# Altium PCB PCB1.PcbDoc (part 6 of 6)
Units mil, origin at the board's own origin, x right, y up, seen from the top; angles counter-clockwise.
Board outline 7480.32 x 4921.26 mil, 4 copper layers (Top Layer, GND, POWER, Bottom Layer), stack 23.756 mil thick; 513 components, 387 nets, 1792 pads, 594 vias.
Unrouted connection lines stored in the file: 21.
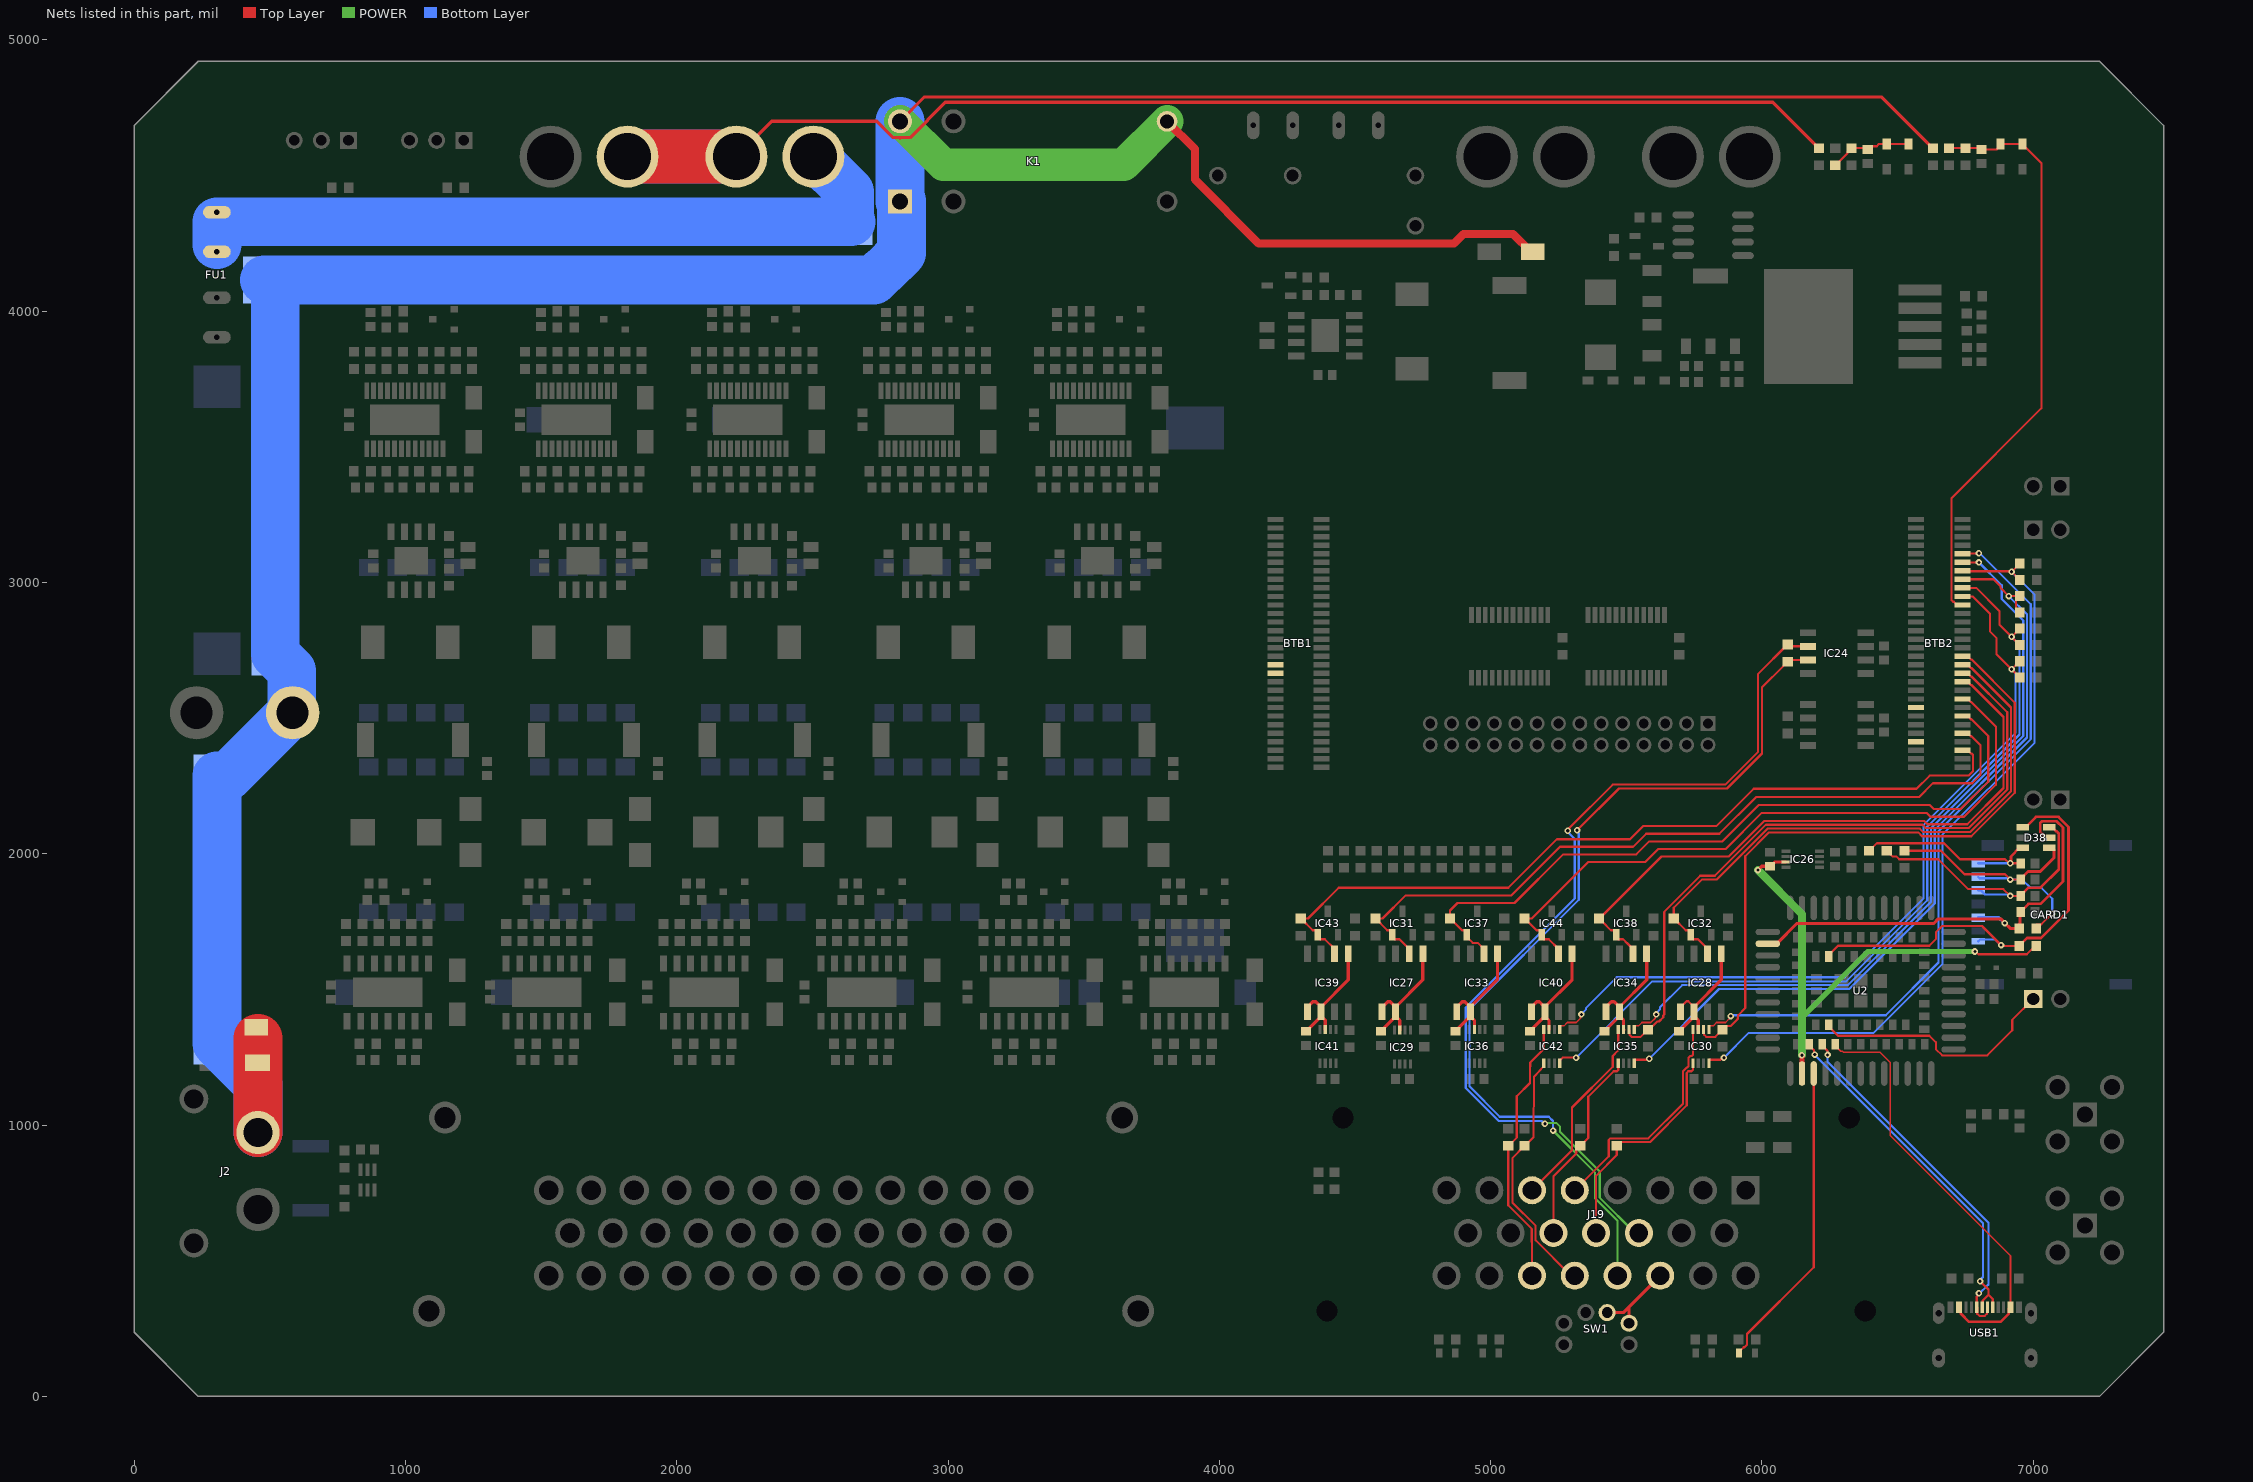
[diagram p7: the nets of this part, all layers, seen from the top]

## Via types
v1: diameter 24, hole 12, Top Layer to Bottom Layer, 532 vias
v2: diameter 48, hole 30, Top Layer to Bottom Layer, 20 vias
v3: diameter 48, hole 24, Top Layer to Bottom Layer, 16 vias
v4: diameter 48, hole 32, Top Layer to Bottom Layer, 10 vias
v5: diameter 60, hole 32, Top Layer to Bottom Layer, 7 vias
v6: diameter 251.97, hole 165.35, Top Layer to Bottom Layer, 4 vias
v7: diameter 31.5, hole 31.5, Top Layer to Bottom Layer, 2 vias
v8: diameter 47.24, hole 47.24, Top Layer to Bottom Layer, 2 vias
v9: diameter 36, hole 24, Top Layer to Bottom Layer, 1 vias

## Nets (pads, with @x,y where several pads share a name; then routed paths per layer and width w, separated by ;. In a path a pad name is that pad's centre, name@x,y a point inside that pad or via, vN(x,y) a via of type N, cw(c..) or ccw(c..) an arc to the next point about the centre after c; other vN are vias at no path point) (continued)
OE5_PTE14: BTB2.12 IC35.6 R187.1 | length 2538.4
  Top Layer w8: IC35.6@5509.84,1352.01 5511.75,1350.1 5511.75,1333.01 5519.48,1325.28 5552.8,1325.28 5579.02,1351.5 R187.1@5580,1351.5 5593.72,1365.21 5596.98,1365.21 5613.77,1382 5620.77,1382 5636,1397.23 5636,1404.23 5640,1408.23 5640,1786.21 5772.79,1919 5826.39,1919 6014.39,2107 6592.19,2107 6604.19,2095 6762.3,2095 6904.11,2236.82 6904.11,2521.84 6772.25,2653.7 6769.92,2653.7 6758.27,2665.35 BTB2.12@6738.58,2665.35
OE6_PTC31: BTB2.14 IC30.6 R182.1 | length 2484.3
  Top Layer w8: IC30.6@5784.84,1352.01 5786.75,1350.1 5786.75,1333.01 5794.48,1325.28 5827.8,1325.28 5854.02,1351.5 R182.1@5855,1351.5 5868.72,1365.21 5884.67,1365.21 5910.8,1391.34 5910.8,1394.03 5912.28,1395.51 5912.28,1405.51 5938.33,1431.57 5938.33,1991.35 6025.98,2079 6576,2079 6590,2065 6771.89,2065 6932.11,2225.22 6932.11,2556.83 6772.25,2716.69 6769.92,2716.69 6758.27,2728.35 BTB2.14@6738.58,2728.35
PCAN_H: IC24.7 J19.19 R165.2 | length 3397.9
  Top Layer w8: v1(5318.38,2086.62) 5472.77,2241 5871,2241 6000,2370 6000,2613.5 6080.3,2693.8 6080.3,2694.79 6094.02,2708.5 R165.2@6095,2708.5 6101.5,2715 IC24.7@6170,2715
  POWER w8: v1(5230,980) 5385,825 5385,729.88 5467.56,647.33 J19.19@5467.56,445.04
  Bottom Layer w8: v1(5230,980) 5230,1015 5214,1031 5033.8,1031 4922,1142.8 4922,1427.81 5325,1830.81 5325,2075.67 5318.38,2082.29 v1(5318.38,2086.62)
PCAN_L: IC24.6 J19.11 R165.1 | length 3398.7
  Top Layer w8: v1(5284.44,2084.68) 5284.44,2089.01 5290,2094.57 5290,2095 5450,2255 5865,2255 5986,2376 5986,2663.48 6094.02,2771.5 R165.1@6095,2771.5 6101.5,2765 IC24.6@6170,2765
  POWER w8: v1(5200,1005) 5203.06,1008.06 5212.49,1008.06 5212.69,1008.26 5241.74,1008.26 5256,994 5256,975 5401.89,829.11 5401.89,732.8 5532.16,602.52 J19.11@5546.3,602.52
  Bottom Layer w8: v1(5200,1005) 5197.31,1005 5187.31,1015 5030,1015 4908,1137 4908,1433.6 5310,1835.6 5310,2054.79 5284.44,2080.35 v1(5284.44,2084.68)
PTA24: BTB1.49
PTA25: BTB1.48
PTC10: BTB2.25 IC35.5 | length 2829.2
  Top Layer w6: IC35.5@5529.53,1352.01 5529.53,1362.83 5532.43,1365.74 5545.1,1365.74 5557.57,1378.21 5590.53,1378.21 5606.56,1394.24 5606.56,1404.56 v1(5610,1408)
  Top Layer w8: BTB2.25@6738.58,3074.8 6738.98,3074.4 6799.6,3074.4 v1(6800,3074)
  Bottom Layer w8: v1(5610,1408) 5610,1412.33 5623.8,1426.13 5623.8,1433.8 5706,1516 6316.2,1516 6623,1822.8 6623,2094.3 6963,2434.3 6963,2860.23 6884,2939.23 6884,2990 v1(6800,3074)
PTC10_H: IC35.8 J19.6 | length 723.7
  Top Layer w8: J19.6@5152.6,760 5300,907.4 5300,1065 5450,1215 5450,1255 5470.47,1275.47 IC35.8@5470.47,1352.01
PTC11: BTB2.23 IC35.4 R198.2 R199.1 | length 2971.1
  Top Layer w8: IC35.4@5529.53,1227.99 5529.53,1238.82 5531.43,1240.72 5576.39,1240.72 5580.67,1245 v1(5585,1245) ; BTB2.23@6738.58,3011.81 6853.19,3011.81 6878.98,2986.02 6878.98,2981.02 v1(6910,2950) 6936.28,2950 R199.1@6936.28,2935.3 ; R198.2@6950,2890 6936.99,2903.01 6936.99,2936.99 R199.1@6950,2950
  Bottom Layer w8: v1(5585,1245) 5842,1502 6322,1502 6637,1817 6637,2088.5 6977,2428.5 6977,2883 v1(6910,2950)
PTC11_H: IC35.1 J19.13 R197.1 | length 732.7
  Top Layer w8: J19.13@5231.34,602.52 5231.34,811.34 5315.56,895.56 5315.56,909.79 5329.27,923.5 R197.1@5330,923.5 5330.98,923.5 5360,952.52 5360,1104.97 5453.53,1198.5 5465.79,1198.5 5470.47,1203.19 IC35.1@5470.47,1227.99
PTC24: BTB2.21 IC42.5 R203.2 R204.1 | length 3001.6
  Top Layer w6: IC42.5@5254.53,1352.01 5254.53,1362.83 5257.43,1365.74 5270.1,1365.74 5282.57,1378.21 5315.53,1378.21 5331.35,1394.04 5331.35,1404.56 v1(5334.8,1408)
  Top Layer w8: BTB2.21@6738.58,2948.82 6776.86,2948.82 6840,2885.68 6840,2820 6865,2795 6865,2735 v1(6920,2680) ; R203.2@6950,2650 6950,2650.98 6936.28,2664.7 6935.3,2664.7 v1(6920,2680) ; R204.1@6950,2710 6950,2709.02 6936.28,2695.3 6935.3,2695.3 v1(6920,2680)
  Bottom Layer w8: v1(5334.8,1408) 5334.8,1409.34 5351.09,1425.64 5351.09,1431.3 5464.8,1545 6305,1545 6595,1835 6595,2105.89 6935,2445.89 6935,2665 v1(6920,2680)
PTC24_H: IC42.8 J19.21 R202.1 | length 997.5
  Top Layer w8: J19.21@5152.6,445.04 5152.6,568.59 5151.67,569.52 5151.67,617.59 5065,704.25 R202.1@5065,923.5 5065.98,923.5 5096.3,953.82 5096.3,1106.3 5145,1155 5145,1195 5146.02,1231.02 5195.47,1280.47 IC42.8@5195.47,1352.01
PTC25: BTB2.22 IC42.4 R210.2 R211.1 | length 3095.3
  Top Layer w8: IC42.4@5254.53,1237.89 5254.53,1238.82 5256.43,1240.72 5257.36,1240.72 5265.42,1248.79 v1(5315,1248.79) ; BTB2.22@6738.58,2980.31 6789.69,2980.31 6875,2895 6875,2845 v1(6920,2800) ; R210.2@6950,2770 6950,2770.98 6936.28,2784.7 6935.3,2784.7 v1(6920,2800) ; R211.1@6950,2830 6950,2829.02 6936.28,2815.3 6935.3,2815.3 v1(6920,2800)
  Bottom Layer w8: v1(5315,1248.79) 5596.21,1530 6310.4,1530 6609,1828.6 6609,2100.1 6949,2440.1 6949,2771 v1(6920,2800)
PTC25_H: IC42.1 J19.20 R209.1 | length 932.4
  Top Layer w8: IC42.1@5195.47,1227.99 5193.57,1215.26 5162.12,1181.22 5160.23,1179.17 5160.19,1176.11 5157.54,955.06 5155.23,952.75 5125.98,923.5 R209.1@5125,923.5 5080,878.5 5080,715 5165.67,629.33 5165.67,575.32 5295.94,445.04 J19.20@5310.08,445.04
PTC26: BTB2.24 IC30.4 R213.2 R214.1 | length 2909.6
  Top Layer w8: IC30.4@5804.53,1227.99 5804.53,1238.82 5806.43,1240.72 5847.61,1240.72 5855.67,1248.79 v1(5860,1248.79) ; BTB2.24@6738.58,3043.31 6740.24,3041.65 6918.35,3041.65 v1(6920,3040) ; R213.2@6950,3010 6950,3010.98 6936.28,3024.7 6935.3,3024.7 v1(6920,3040) ; R214.1@6950,3070 6950,3069.02 6920.98,3040 v1(6920,3040)
  Bottom Layer w8: v1(5860,1248.79) 5951.21,1340 6411.57,1340 6665,1593.43 6665,2070 7005,2410 7005,2955 v1(6920,3040)
PTC26_H: IC30.1 J19.12 R212.1 | length 843.8
  Top Layer w8: J19.12@5388.82,602.52 5388.82,813.82 5465,890 R212.1@5465,923.5 5478.72,937.22 5562.22,937.22 5587.02,937.22 5722.68,1072.88 5722.68,1097.68 5722.68,1192.65 5728.53,1198.5 5740.79,1198.5 5745.47,1203.19 IC30.1@5745.47,1227.99
PTC27: BTB2.26 IC30.5 | length 2750.4
  Top Layer w6: IC30.5@5804.53,1352.01 5804.53,1362.83 5807.43,1365.74 5820.1,1365.74 5832.57,1378.21 5865.53,1378.21 5884.8,1397.48 v1(5884.8,1402.1)
  Top Layer w8: BTB2.26@6738.58,3106.3 6739.43,3107.15 6799.15,3107.15 v1(6800,3108)
  Bottom Layer w8: v1(5884.8,1402.1) 5887.69,1405 6456.77,1405 6651,1599.23 6651,2082.7 6991,2422.7 6991,2919.77 6802.77,3108 v1(6800,3108)
PTC27_H: IC30.8 J19.5 | length 858.8
  Top Layer w8: J19.5@5310.08,760 5435,884.92 5435,945 5441.22,951.22 5581.22,951.22 5708.68,1078.68 5708.68,1198.44 5722.74,1212.5 5724.88,1212.5 5729.57,1217.19 5729.57,1248.87 5735.42,1254.72 5740.79,1254.72 5745.47,1259.41 IC30.8@5745.47,1352.01
PTD9: BTB2.53
PTD11: BTB2.57
STATUS: LED4.1 U2.25 | length 1145.9
  Top Layer w8: LED4.1@5915.47,160 5915.47,163.93 5932.83,181.3 5935.36,181.3 5945,190.94 5945,230 6190.9,475.9 U2.25@6190.9,1190.31
USB_BOOT: J66.1 U2.82 | length 927.6
  Top Layer w8: U2.82@6246.02,1369.45 6246.02,1363.54 6280.02,1329.55 6616.99,1329.55 6641.21,1305.33 6641.21,1280.02 6664.15,1257.08 6830.82,1257.08 6922.89,1349.15 6922.89,1387.89 J66.1@7000,1465
USB_DM: U2.60 USB1.5 USB1.7 | length 1336.8
  Top Layer w8: U2.60@6222.4,1298.58 6232.18,1288.8 6232.18,1282.89 6241.94,1273.14 v1(6241.94,1258.88) ; v1(6800,380) 6800,375.67 6791.97,367.64 USB1.5@6791.97,328.51 6793.88,326.6 6793.88,304.58 6801.6,296.85 6821.7,296.85 6829.44,304.59 6829.44,326.6 USB1.7@6831.34,328.51
  Bottom Layer w8: v1(6241.94,1258.88) 6241.94,1233.06 6835,640 6835,410.45 ; v1(6800,380) 6801.77,380 6830,408.23 6835,413.23
USB_DP: U2.59 USB1.6 USB1.8 | length 1334
  Top Layer w6: USB1.8@6850,347.16 USB1.8@6851.02,328.51
  Top Layer w8: U2.59@6175.15,1298.58 6175.15,1292.67 6191.94,1275.89 6191.94,1263.06 v1(6195,1260) ; v1(6804,425) 6835,394 6835,375 ; USB1.6@6811.65,328.51 6813.56,330.41 6813.56,353.56 6835,375 ; USB1.8@6851.02,328.51 6851.02,358.98 6835,375
  Bottom Layer w8: v1(6195,1260) 6195,1258.23 6815,638.23 6815,440.33 6804,429.33 v1(6804,425)
USB_VBUS: U2.61 USB1.2 USB1.11 | length 1574.6
  Top Layer w6: U2.61@6269.64,1298.58 6269.64,1292.67 6290.31,1272 6297.28,1272 6300.69,1268.59 6435.36,1268.59 6473.24,1230.71 6473.24,961.76 6915.99,519.01 USB1.11@6915.99,328.51
  Top Layer w10: USB1.2@6727.01,328.51 6732.84,322.68 6732.84,305.15 6762.99,275 6880.01,275 6910.16,305.15 6910.16,322.68 USB1.11@6915.99,328.51
USIM_CLK: C97.1 CARD1.C3 D38.3 R174.1 | length 801.9
  Top Layer w8: R174.1@6395,2011.5 6395.98,2011.5 6423.7,2039.21 6670.79,2039.21 6730,1980 6896.06,1980 6911.06,1965 v1(6915,1965) C97.1@6954.02,1965
  Top Layer w10: v1(6915,1965) 6917.68,1967.68 6917.68,1990.32 6949.96,2022.6 D38.3@6960.79,2022.6
  Bottom Layer w8: CARD1.C3@6797.33,1965.16 6797.49,1965 v1(6915,1965)
USIM_DATA: C99.1 CARD1.C7 D38.4 R171.1 R173.1 | length 1109.2
  Top Layer w8: R171.1@6525,2011.5 6660.23,2011.5 6746.72,1925 6896.06,1925 v1@6911.06,1910 ; v1(6915,1905) C99.1@6954.02,1905 ; R173.1@7011.5,1740 7030,1740 v1(7070,1780)
  Top Layer w10: C99.1@6954.02,1905 6954.02,1907.17 6981.35,1934.5 7025.89,1934.5 7076.85,1985.47 7076.85,2015.79 7070.04,2022.6 D38.4@7059.21,2022.6
  Bottom Layer w8: CARD1.C7@6797.32,1915.16 6802.47,1910 v1@6915,1910 ; v1(6915,1905) 6960,1905 6990,1875 7030,1875 7070,1835 v1(7070,1780)
USIM_DET: CARD1.CD D38.1 R175.1 U2.79 | length 1636.4
  Top Layer w8: U2.79@6246.02,1621.41 6246.02,1627.32 6280.02,1661.31 6616.99,1661.31 6641.21,1685.53 6641.21,1710.84 6664.15,1733.78 6811.22,1733.78 v1(6881.16,1663.84) 6885.49,1663.84 6888.63,1660.7 R175.1@6947.8,1660.7
  Top Layer w10: R175.1@6948.5,1660 6948.5,1660.98 6977.22,1689.7 7028.17,1689.7 7130,1791.53 7130,2099.25 7093.03,2136.21 7010.43,2136.21 6971.61,2097.4 D38.1@6960.79,2097.4
  Bottom Layer w8: CARD1.CD@6797.32,1677.76 6803.41,1683.84 6861.16,1683.84 v1(6881.16,1663.84)
USIM_RST: C98.1 CARD1.C2 D38.6 R172.1 | length 1052.9
  Top Layer w8: R172.1@6460,2011.5 6460.98,2011.5 6474.7,1997.78 6474.7,1996.8 6481.86,1989.64 6496.3,1989.64 6505.94,1980 6650,1980 6760,1870 6890,1870 v1(6915,1845) C98.1@6954.02,1845
  Top Layer w10: C98.1@6954.02,1845 6954.02,1847.17 6982.35,1875.5 7026.88,1875.5 7094,1942.62 7094,2075.22 7085.78,2083.44 7084,2083.44 7070.04,2097.4 D38.6@7059.21,2097.4
  Bottom Layer w8: CARD1.C2@6797.32,1865.16 6807.16,1865.16 6822.32,1850 v1@6922.15,1850
USIM_VDD: C96.2 CARD1.C1 D38.5 R173.2 U2.14 | length 1705.7
  Top Layer w10: C96.2@6954.02,1785 6954.02,1787.17 6982.35,1815.5 7026.88,1815.5 7110,1898.62 7110,2096.62 7086.41,2120.21 7032.02,2120.21 7025.57,2113.77 7025.57,2081.03 7032.65,2073.96 7034.42,2073.96 7048.39,2060 D38.5@7059.21,2060
  Top Layer w12: U2.14@6021.61,1668.66 6053.85,1668.66 6128.47,1743.27 6633.83,1743.27 6650.56,1760 6880,1760 v1(6895,1745) 6915,1725 R173.2@6948.5,1725 ; R173.2@6948.5,1740 6951.26,1742.76 C96.2@6951.26,1785
  Bottom Layer w12: CARD1.C1@6797.32,1765.16 6872.73,1765.16 6892.88,1745 v1(6895,1745)
VBAT: D7.1 D8.2 D11.1 J2.+ J9.1 J9.2 J21.1 J21.2 J22.1 J22.2 J23.1 J23.2 K1.1 K1.2 K1.6 L2.2 R150.2 | length 13192.2
  Top Layer w12: K1.2@2823.15,4700 2913.15,4790 6440.51,4790 6629.02,4601.5 R150.2@6630,4601.5
  Top Layer w30: K1.6@3807.4,4700 3910,4597.4 3910,4485 4145,4250 4865,4250 4900,4285 5082.91,4285 5147.91,4220 D11.1@5160.71,4220
  Top Layer w180: J2.+@456.22,972.48 456.22,1320
  POWER w120: K1.2@2823.15,4700 2983.15,4540 3647.4,4540 K1.6@3807.4,4700
  Bottom Layer w180: J2.+@456.22,972.48 456.22,1151.65 J9.2@305,1302.87 J9.1@305,2287.13 346.9,2287.13 579.77,2520 L2.2@584.33,2520 ; J22.1@480.75,4115 J22.2@1465,4115 ; J22.1@520,4075.75 J21.2@520,3720 J21.1@520,2735.75 581.11,2674.64 L2.2@581.11,2523.22 ; J22.2@1490,4115 J23.1@1635,4115 ; J23.1@1657.87,4115 2726.25,4115 2758.64,4147.39 2760.63,4147.39 2828.13,4214.88 2828.13,4399.75 K1.1@2823.15,4404.72 ; K1.2@2823.15,4700 2823.15,4412.02 K1.1@2828.13,4407.04
Vbat1: *1.+ FU1.1 J3.1 J3.2 J4.1 J4.2 | length 2641.2
  Bottom Layer w180: 305,4245 305,4330 J3.1@455,4330 ; J3.1@480.75,4330 J3.2@1465,4330 ; J3.2@1485,4330 J4.1@1640,4330 ; J4.1@1657.87,4330 J4.2@2625,4330 ; *1.+@2503.46,4570 2507.53,4570 2637.15,4440.39 2637.15,4334.98 J4.2@2642.13,4330
Vbat2: *1.- *2.+ R152.2 | length 4995.6
  Top Layer w12: *1.-@2220,4570 2350.17,4700.17 2737.71,4700.17 2794.37,4643.51 2797.88,4640 2817.23,4640 ccw(c2823.15,4700) 2823.64,4639.71 2860,4640 2990,4770 6040.51,4770 6209.02,4601.5 R152.2@6210,4601.5
  Top Layer w200: *2.+@1818.46,4570 *1.-@2220,4570
  Bottom Layer w200: *2.+@1818.46,4570 *1.-@2220,4570
Vbat2_IN: C87.2 E4.2 E6.1 R153.1 R157.2 | length 309.6
  Top Layer w8: R153.1@6270,4538.5 6270.98,4538.5 6315.3,4582.82 6315.3,4587.78 6329.02,4601.5 R157.2@6330,4601.5 6384.49,4601.5 C87.2@6390,4595.98 6402.34,4608.32 6422.95,4608.32 6430.79,4616.16 E6.1@6460,4616.16 E4.2@6540,4616.16
VBATSensor_PTC23: BTB2.20 C86.2 E3.2 E5.1 R151.1 R156.2 | length 2177.7
  Top Layer w8: R151.1@6690,4601.5 R156.2@6750,4601.5 6804.49,4601.5 C86.2@6810,4595.98 6864.74,4595.98 6880,4611.24 E5.1@6880,4616.16 E3.2@6960,4616.16 7030,4546.16 7030,3642.47 6699.06,3311.52 6699.06,2934.83 6704.91,2928.98 6707.24,2928.98 6718.9,2917.32 BTB2.20@6738.58,2917.32
VCU_Bootloader: J19.18 SW1.2 SW1.5 | length 312.4
  Top Layer w12: SW1.5@5429.37,309.06 5489.06,309.06 5510.08,330.08 ; SW1.2@5510.08,269.68 5510.08,330.08 ; J19.18@5625.04,445.04 5510.08,330.08
VDD_EXT: C94.1 IC26.3 R175.2 U2.24 | length 1916.1
  Top Layer w8: v1(6785,1640) 6787.69,1640 6797.69,1630 6976.5,1630 6996.8,1650.3 6997.78,1650.3 7011.5,1664.02 R175.2@7011.5,1665
  Top Layer w12: v1(5985,1940) 5999.02,1954.02 C94.1@6030,1954.02 6032.17,1954.02 6048.31,1970.16 IC26.3@6087.99,1970.16
  Top Layer w20: U2.24@6147.59,1190.31 v1(6147.59,1257.7)
  POWER w20: 6147.59,1355 6147.59,1359.58 ; 6147.59,1397.59 6390,1640 v1(6785,1640)
  POWER w30: v1(5985,1940) 6147.59,1777.41 6147.59,1397.59 6147.59,1359.58 ; v1(6147.59,1257.7) 6147.59,1355
Vvar1: C109.1 IC39.1 IC39.5 IC39.6 IC41.7 | length 490.5
  Top Layer w12: C109.1@4320,1345.98 4322.17,1345.98 4332.5,1356.32 4332.5,1358.49 4368.2,1394.19 IC39.6@4374.98,1400.98 ; IC39.5@4325,1418.23 4325,1435.45 4344.55,1455 4355.45,1455 IC39.6@4375,1435.45 ; IC41.7@4390.16,1352.01 4390.16,1386.74 4382.69,1394.21 4381.8,1394.21 IC39.6@4375,1401 ; IC39.1@4475,1631.77 4475,1535.45 IC39.6@4375,1435.45 ; IC39.6@4375,1401 IC39.6@4375,1418.23 IC39.6@4375,1435.45
Vvar1_Ctrl_PTE8: BTB2.3 IC39.2 IC43.1 R207.1 | length 3006.7
  Top Layer w8: IC39.2@4425,1631.77 4425,1649 4388.97,1685.02 4370.41,1685.02 4362.6,1692.83 IC43.1@4362.6,1701.69 4362.6,1710.55 4354.79,1718.36 4344.12,1718.36 4300.98,1761.5 4326.57,1761.5 4440.07,1875 5065,1875 5244,2054 5513.6,2054 5561.6,2102 5831.2,2102 5969.2,2240 6570,2240 6618.32,2288.32 6761.52,2288.32 6778.11,2304.91 6778.11,2364.38 6772.25,2370.24 6769.92,2370.24 6758.27,2381.89 BTB2.3@6738.58,2381.89
Vvar2: C101.1 IC27.1 IC27.5 IC27.6 IC29.7 | length 491.9
  Top Layer w12: C101.1@4595,1345.98 4597.17,1345.98 4607.5,1356.32 4607.5,1358.51 IC27.6@4650,1401 ; IC27.5@4600,1418.23 4600,1435.45 4606.8,1442.25 4607.25,1442.25 4620.03,1455.03 4629.97,1455.03 4642.75,1442.25 4643.2,1442.25 IC27.6@4650,1435.45 ; IC29.7@4665,1350 4665,1386 IC27.6@4650,1401 ; IC27.1@4750,1631.77 4750,1535.45 IC27.6@4650,1435.45 ; IC27.6@4650,1401 IC27.6@4650,1418.23 IC27.6@4650,1435.45
Vvar2_Ctrl_PTB4: BTB2.5 IC27.2 IC31.1 R183.1 | length 2843.3
  Top Layer w8: R183.1@4575,1761.5 R183.1@4575.98,1761.5 ; IC27.2@4700,1631.77 4700,1649 4663.97,1685.02 4645.41,1685.02 4637.6,1692.83 IC31.1@4637.6,1701.69 4637.6,1710.55 4629.79,1718.36 4619.12,1718.36 R183.1@4575.98,1761.5 ; BTB2.5@6738.58,2444.88 6758.27,2444.88 6769.92,2433.23 6772.25,2433.23 6806.11,2399.37 6806.11,2291.11 6775.32,2260.32 6629.92,2260.32 6578.6,2209 5977.79,2209 5842.79,2074 5573.2,2074 5525.2,2026 5255.6,2026 5076.6,1847 4687.07,1847 4601.57,1761.5 R183.1@4575.98,1761.5
Vvar3: C107.1 IC33.1 IC33.5 IC33.6 IC36.7 | length 490
  Top Layer w12: C107.1@4870,1345.98 4872.17,1345.98 4882.5,1356.32 4882.5,1358.51 IC33.6@4925,1401 ; IC33.5@4875,1418.23 4875,1435.45 4881.8,1442.25 4882.25,1442.25 4895.03,1455.03 4904.97,1455.03 4917.75,1442.25 4918.2,1442.25 IC33.6@4925,1435.45 ; IC36.7@4940.16,1352.01 4940.06,1352.1 4940.06,1385.94 IC33.6@4925,1401 ; IC33.1@5025,1631.77 5025,1535.45 IC33.6@4925,1435.45 ; IC33.6@4925,1401 IC33.6@4925,1418.23 IC33.6@4925,1435.45
Vvar3_Ctrl_PTD16: BTB2.7 IC33.2 IC37.1 R188.1 | length 2716.6
  Top Layer w8: IC33.2@4975,1631.77 4975,1649 4952.2,1671.79 4933.64,1671.79 4912.6,1692.83 IC37.1@4912.6,1701.69 4912.6,1710.55 4904.79,1718.36 4894.12,1718.36 4850.98,1761.5 R188.1@4850,1761.5 4850,1791.21 4877.79,1819 5088.2,1819 5267.2,1998 5536.79,1998 5584.79,2046 5854.39,2046 5988.39,2180 6618.18,2180 6633.18,2165 6733.3,2165 6834.11,2265.81 6834.11,2434.36 6772.25,2496.22 6769.92,2496.22 6758.27,2507.87 BTB2.7@6738.58,2507.87
Vvar4: C111.1 IC40.1 IC40.5 IC40.6 IC42.7 | length 490
  Top Layer w12: C111.1@5145,1345.98 5147.17,1345.98 5157.5,1356.32 5157.5,1358.51 IC40.6@5200,1401 ; IC40.5@5150,1418.23 5150,1435.45 5156.8,1442.25 5157.25,1442.25 5170.03,1455.03 5179.97,1455.03 5192.75,1442.25 5193.2,1442.25 IC40.6@5200,1435.45 ; IC42.7@5215.16,1352.01 5215.06,1352.1 5215.06,1385.94 IC40.6@5200,1401 ; IC40.1@5300,1631.77 5300,1535.45 IC40.6@5200,1435.45 ; IC40.6@5200,1401 IC40.6@5200,1418.23 IC40.6@5200,1435.45
Vvar4_Ctrl_PTA28: BTB2.9 IC40.2 IC44.1 R208.1 | length 2511.2
  Top Layer w8: R208.1@5125,1761.5 R208.1@5125.98,1761.5 ; IC40.2@5250,1631.77 5250,1649 5213.97,1685.02 5195.41,1685.02 5187.6,1692.83 IC44.1@5187.6,1701.69 5187.6,1710.55 5179.79,1718.36 5169.12,1718.36 R208.1@5125.98,1761.5 ; BTB2.9@6758.27,2570.87 6769.92,2559.21 6772.25,2559.21 6862.11,2469.35 6862.11,2254.21 6744.9,2137 6621.58,2137 6608.58,2150 5997.99,2150 5865.99,2018 5617.89,2018 5569.89,1970 5360.07,1970 5151.57,1761.5 R208.1@5125.98,1761.5
Vvar5: C105.1 IC34.1 IC34.5 IC34.6 IC35.7 | length 490
  Top Layer w12: C105.1@5420,1345.98 5422.17,1345.98 5432.5,1356.32 5432.5,1358.51 IC34.6@5475,1401 ; IC34.5@5425,1418.23 5425,1435.45 5431.8,1442.25 5432.25,1442.25 5445.03,1455.03 5454.97,1455.03 5467.75,1442.25 5468.2,1442.25 IC34.6@5475,1435.45 ; IC35.7@5490.16,1352.01 5490.06,1352.1 5490.06,1385.94 IC34.6@5475,1401 ; IC34.1@5575,1631.77 5575,1535.45 IC34.6@5475,1435.45 ; IC34.6@5475,1401 IC34.6@5475,1418.23 IC34.6@5475,1435.45
Vvar5_Ctrl_PTE3: BTB2.11 IC34.2 IC38.1 R190.1 | length 2365
  Top Layer w8: R190.1@5400,1761.5 R190.1@5400.98,1761.5 ; IC34.2@5525,1631.77 5525,1649 5502.59,1671.41 5501.82,1671.41 5488.21,1685.02 5470.41,1685.02 5462.6,1692.83 IC38.1@5462.6,1701.69 5462.6,1710.55 5454.79,1718.36 5443.13,1718.36 5414.7,1746.8 5414.7,1747.78 R190.1@5400.98,1761.5 ; BTB2.11@6738.58,2633.86 6758.27,2633.86 6769.92,2622.2 6772.25,2622.2 6890.11,2504.35 6890.11,2242.61 6756.5,2109 6609.99,2109 6597.99,2121 6008.59,2121 5877.59,1990 5629.49,1990 R190.1@5400.98,1761.5
Vvar6: C103.1 IC28.1 IC28.5 IC28.6 IC30.7 | length 491.8
  Top Layer w8: IC28.5@5700,1418.23 5700,1435.45 5708.8,1444.25 5709.25,1444.25 5721.69,1456.69 5728.31,1456.69 5740.75,1444.25 5741.2,1444.25 5750,1435.45 IC28.6@5750,1435
  Top Layer w12: C103.1@5695,1345.98 5697.17,1345.98 5707.5,1356.32 5707.5,1358.51 IC28.6@5750,1401 ; IC30.7@5765.16,1352.01 5765.06,1352.1 5765.06,1385.94 IC28.6@5750,1401 ; IC28.1@5850,1631.77 5850,1535.45 5750,1435.45 IC28.6@5750,1418.23 IC28.6@5750,1401
Vvar6_Ctrl_PTE7: BTB2.13 IC28.2 IC32.1 R184.1 | length 2224
  Top Layer w8: IC28.2@5800,1631.77 5800,1649 5763.97,1685.02 5745.41,1685.02 5737.6,1692.83 IC32.1@5737.6,1701.69 5737.6,1710.55 5729.79,1718.36 5719.12,1718.36 5675.98,1761.5 R184.1@5675,1761.5 5675,1801.41 5778.59,1905 5832.18,1905 6020.18,2093 6582,2093 6595,2080 6767.09,2080 6918.11,2231.02 6918.11,2539.34 6772.25,2685.2 6769.92,2685.2 6758.27,2696.85 BTB2.13@6738.58,2696.85
pads on no net: BTB1.32 BTB2.28 CARD1.C6 D5.2 D6.2 D14.2 D17.2 D21.2 D23.2 D27.2 D29.2 D32.2 D35.2 D36.2 IC1.2 IC1.3 IC1.5 IC2.2 IC2.3 IC2.5 IC3.7 IC3.11 IC4.1 IC4.3 IC4.12 IC4.14 IC4.15 IC4.16 IC4.18 IC4.19 IC4.21 IC4.22 IC4.23 IC5.2 IC5.3 IC5.5 IC6.7 IC6.11 IC7.1 IC7.3 IC7.12 IC7.14 IC7.15 IC7.16 IC7.18 IC7.19 IC7.21 IC7.22 IC7.23 IC8.2 IC8.3 IC8.5 IC9.7 IC9.11 IC10.2 IC10.3 IC10.5 IC11.1 IC11.3 IC11.12 IC11.14 IC11.15 IC11.16 IC11.18 IC11.19 IC11.21 IC11.22 IC11.23 IC12.7 IC12.11 IC14.2 IC14.3 IC14.5 IC15.6 IC16.1 IC16.3 IC16.12 IC16.14 IC16.15 IC16.16 IC16.18 IC16.19 IC16.21 IC16.22 IC16.23 IC17.7 IC17.11 IC19.7 IC19.11 IC20.1 IC20.3 IC20.12 IC20.14 IC20.15 IC20.16 IC20.18 IC20.19 IC20.21 IC20.22 IC20.23 J2.3 J2.4 J7.28 J7.29 J7.MH1 J7.MH2 J7.MH3 J7.MH4 J19.MH1 J19.MH2 J19.MH3 J19.MH4 J65.1 SW1.1 SW1.3 U2.2 U2.3 U2.4 U2.5 U2.6 U2.7 U2.8 U2.9 U2.15 U2.19 U2.20 U2.21 U2.22 U2.23 U2.26 U2.28 U2.29 U2.30 U2.31 U2.32 U2.33 U2.38 U2.39 U2.44 U2.49 U2.50 U2.51 U2.52 U2.53 U2.54 U2.55 U2.56 U2.57 U2.58 U2.62 U2.63 U2.64 U2.65 U2.66 U2.67 U2.68 U2.69 U2.74 U2.75 U2.76 U2.77 U2.78 U2.80 U2.81 U2.83 U2.84 U2.85 U2.86 U2.87 U2.96 U2.97 U2.98 U2.99 U2.100 U2.101 U2.102 U2.103 U2.104 U2.105 U2.106 U2.107 U2.108 U2.109 USB1.3 USB1.9
copper on no net:
  other v7: 4291.34,3330.71 6653.54,3330.71
  other v8: 4291.34,2220.47 6653.54,2220.47

## Polygon pours and split planes (outlines as drawn)
GND on Top Layer "gnd" (solid, remove dead copper, pour order 50): 295,5195 -240,4660 -240,210 210,-240 7380,-240 7780,160 7780,4925 7470,5235
NetC2_2 on Top Layer "NETC2_2_L01_P016" (solid, remove dead copper, pour order 16): 760,3240 940,3240 960,3220 960,3140 930,3110 885,3110 850,3075 850,2915 890,2875 930,2875 965,2840 965,2335 935,2305 805,2305 775,2335 775,2750 715,2810 715,3195
hpHSD1_OUT1 on Top Layer "HPHSD1_OUT1_L01_P000" (solid, pour order 0): 755,1400 775,1420 885,1420 905,1400 905,1335 865,1295 865,1205 850,1190 770,1190 755,1205
hpHSD1_OUT0 on Top Layer "HPHSD1_OUT0_L01_P001" (solid, pour order 1): 965,1405 980,1420 1095,1420 1110,1405 1110,1205 1095,1190 1025,1190 1010,1205 1010,1290 965,1335
hpHSD2_OUT1 on Top Layer "HPHSD2_OUT1_L01_P002" (solid, pour order 2): 1341.11,1400 1361.11,1420 1471.11,1420 1491.11,1400 1491.11,1335 1451.11,1295 1451.11,1205 1436.11,1190 1356.11,1190 1341.11,1205
hpHSD3_OUT1 on Top Layer "HPHSD3_OUT1_L01_P003" (solid, pour order 3): 1921.11,1400 1941.11,1420 2051.11,1420 2071.11,1400 2071.11,1335 2031.11,1295 2031.11,1205 2016.11,1190 1936.11,1190 1921.11,1205
hpHSD4_OUT1 on Top Layer "HPHSD4_OUT1_L01_P004" (solid, pour order 4): 2501.11,1400 2521.11,1420 2631.11,1420 2651.11,1400 2651.11,1335 2611.11,1295 2611.11,1205 2596.11,1190 2516.11,1190 2501.11,1205
hpHSD5_OUT1 on Top Layer "HPHSD5_OUT1_L01_P005" (solid, pour order 5): 3101.11,1400 3121.11,1420 3231.11,1420 3251.11,1400 3251.11,1335 3211.11,1295 3211.11,1205 3196.11,1190 3116.11,1190 3101.11,1205
hpHSD6_OUT1 on Top Layer "HPHSD6_OUT1_L01_P006" (solid, pour order 6): 3691.11,1400 3711.11,1420 3821.11,1420 3841.11,1400 3841.11,1335 3801.11,1295 3801.11,1205 3786.11,1190 3706.11,1190 3691.11,1205
hpHSD2_OUT0 on Top Layer "HPHSD2_OUT0_L01_P007" (solid, pour order 7): 1551.11,1405 1566.11,1420 1681.11,1420 1696.11,1405 1696.11,1205 1681.11,1190 1611.11,1190 1596.11,1205 1596.11,1290 1551.11,1335
hpHSD3_OUT0 on Top Layer "HPHSD3_OUT0_L01_P008" (solid, pour order 8): 2131.11,1405 2146.11,1420 2261.11,1420 2276.11,1405 2276.11,1205 2261.11,1190 2191.11,1190 2176.11,1205 2176.11,1290 2131.11,1335
hpHSD4_OUT0 on Top Layer "HPHSD4_OUT0_L01_P009" (solid, pour order 9): 2711.11,1405 2726.11,1420 2841.11,1420 2856.11,1405 2856.11,1205 2841.11,1190 2771.11,1190 2756.11,1205 2756.11,1290 2711.11,1335
hpHSD5_OUT0 on Top Layer "HPHSD5_OUT0_L01_P010" (solid, pour order 10): 3311.11,1405 3326.11,1420 3441.11,1420 3456.11,1405 3456.11,1205 3441.11,1190 3371.11,1190 3356.11,1205 3356.11,1290 3311.11,1335
hpHSD6_OUT0 on Top Layer "HPHSD6_OUT0_L01_P011" (solid, pour order 11): 3901.11,1405 3916.11,1420 4031.11,1420 4046.11,1405 4046.11,1205 4031.11,1190 3961.11,1190 3946.11,1205 3946.11,1290 3901.11,1335
NetC14_2 on Top Layer "NETC14_2_L01_P017" (solid, remove dead copper, pour order 17): 1392.35,3240 1572.35,3240 1592.35,3220 1592.35,3140 1562.35,3110 1515,3110 1482.35,3077.35 1482.35,2917.65 1525,2875 1562.35,2875 1597.35,2840 1597.35,2335 1567.35,2305 1437.35,2305 1407.35,2335 1407.35,2750 1347.35,2810 1347.35,3195
NetC22_2 on Top Layer "NETC22_2_L01_P018" (solid, remove dead copper, pour order 18): 2022.35,3240 2202.35,3240 2222.35,3220 2222.35,3140 2192.35,3110 2150,3110 2112.35,3072.35 2112.35,2917.65 2155,2875 2192.35,2875 2227.35,2840 2227.35,2335 2197.35,2305 2067.35,2305 2037.35,2335 2037.35,2750 1977.35,2810 1977.35,3195
NetC34_2 on Top Layer "NETC34_2_L01_P019" (solid, remove dead copper, pour order 19): 2662.35,3240 2842.35,3240 2862.35,3220 2862.35,3140 2832.35,3110 2785,3110 2752.35,3077.35 2752.35,2917.65 2795,2875 2832.35,2875 2867.35,2840 2867.35,2335 2837.35,2305 2707.35,2305 2677.35,2335 2677.35,2750 2617.35,2810 2617.35,3195
NetC43_2 on Top Layer "NETC43_2_L01_P020" (solid, remove dead copper, pour order 20): 3292.35,3240 3472.35,3240 3492.35,3220 3492.35,3140 3462.35,3110 3415,3110 3382.35,3077.35 3382.35,2917.65 3425,2875 3462.35,2875 3497.35,2840 3497.35,2335 3467.35,2305 3337.35,2305 3307.35,2335 3307.35,2750 3247.35,2810 3247.35,3195
NetC3_1 on Top Layer "NETC3_1_L01_P022" (solid, remove dead copper, pour order 22): 1055,2545 1225,2545 1255,2515 1255,2335 1290,2300 1315,2300 1340,2275 1340,2125 1315,2100 1210,2100 1170,2060 1170,2030 1145,2005 1050,2005 1025,2030 1025,2515
NetC15_1 on Top Layer "NETC15_1_L01_P023" (solid, remove dead copper, pour order 23): 1685,2545 1855,2545 1885,2515 1885,2335 1920,2300 1945,2300 1970,2275 1970,2125 1945,2100 1840,2100 1800,2060 1800,2030 1775,2005 1680,2005 1655,2030 1655,2515
NetC24_1 on Top Layer "NETC24_1_L01_P024" (solid, remove dead copper, pour order 24): 2314.58,2545 2484.58,2545 2514.58,2515 2514.58,2335 2549.58,2300 2574.58,2300 2599.58,2275 2599.58,2125 2574.58,2100 2469.58,2100 2429.58,2060 2429.58,2030 2404.58,2005 2309.58,2005 2284.58,2030 2284.58,2515
NetC35_1 on Top Layer "NETC35_1_L01_P025" (solid, remove dead copper, pour order 25): 2954.58,2545 3124.58,2545 3154.58,2515 3154.58,2335 3189.58,2300 3214.58,2300 3239.58,2275 3239.58,2125 3214.58,2100 3109.58,2100 3069.58,2060 3069.58,2030 3044.58,2005 2949.58,2005 2924.58,2030 2924.58,2515
NetC44_1 on Top Layer "NETC44_1_L01_P026" (solid, remove dead copper, pour order 26): 3584.58,2545 3754.58,2545 3784.58,2515 3784.58,2335 3819.58,2300 3844.58,2300 3869.58,2275 3869.58,2125 3844.58,2100 3739.58,2100 3699.58,2060 3699.58,2030 3674.58,2005 3579.58,2005 3554.58,2030 3554.58,2515
GND on Bottom Layer "Bottom" (solid, remove dead copper, pour order 53): 295,5380 -390,4695 -390,-30 65,-485 7450,-485 7990,55 7990,4945 7575,5360
GLVMS- on Bottom Layer "GLVMS-_L04_P037" (solid, remove dead copper, pour order 37): 3430,3655 3625,3655 3625,3545 3430,3545
GLVMS- on Bottom Layer "GLVMS-_L04_P036" (solid, remove dead copper, pour order 36): 2795,3655 2985,3655 2985,3545 2795,3545
GLVMS- on Bottom Layer "GLVMS-_L04_P035" (solid, remove dead copper, pour order 35): 2169.8,3655 2360,3655 2360,3545 2169.8,3545
GLVMS- on Bottom Layer "GLVMS-_L04_P034" (solid, remove dead copper, pour order 34): 1500,3655 1730,3655 1730,3545 1500,3545
GLVMS- on Bottom Layer "GLVMS-_L04_P033" (solid, remove dead copper, pour order 33): 910,3655 1100,3655 1100,3545 910,3545
GLVMS- on Bottom Layer "GLVMS-_L04_P032" (solid, remove dead copper, pour order 32): 3770,1545 4075,1545 4075,1435 3770,1435
GLVMS- on Bottom Layer "GLVMS-_L04_P031" (solid, remove dead copper, pour order 31): 3190,1545 3400,1545 3400,1435 3190,1435
GLVMS- on Bottom Layer "GLVMS-_L04_P030" (solid, remove dead copper, pour order 30): 2590,1545 2820,1545 2820,1435 2590,1435
GLVMS- on Bottom Layer "GLVMS-_L04_P029" (solid, remove dead copper, pour order 29): 2010,1545 2185,1545 2185,1435 2010,1435
GLVMS- on Bottom Layer "GLVMS-_L04_P028" (solid, remove dead copper, pour order 28): 1380,1545 1615,1545 1615,1435 1380,1435
GLVMS- on Bottom Layer "GLVMS-_L04_P027" (solid, remove dead copper, pour order 27): 805,1545 1025,1545 1025,1435 805,1435
GND on GND "gnd" (solid, remove dead copper, pour order 51): 225,5305 -430,4650 -430,-155 85,-670 7215,-670 8045,160 8045,4770 7480,5335
GND on POWER "Power" (solid, remove dead copper, pour order 52): 255,5390 -440,4695 -440,105 180,-515 7505,-515 8060,40 8060,4935 7605,5390

## Silkscreen, mask and mechanical layers (free items; w line width, h text height)
Top Overlay:
  lines w20: 4094.49,2047.24 4251.97,1889.76 6692.91,1889.76 6850.39,2047.24 6850.39,3503.94 6692.91,3661.42 4251.97,3661.42 4094.49,3503.94 4094.49,2047.24
Top Solder:
  lines w80: 1065,1230 1160,1230 1190,1200 1515,875 1575,875 1635,815 1670,780 1670,775.2 ; 1980,1215 1980,950 2115,815 2150,780 2157.64,772.36 2157.64,760 ; 2225,1225 2225,855 2315.12,764.88 ; 2630.08,760 2630.08,775.08 2635,780 2680,825 2790,935 2805,950 2805,1215 2800,1220 ; 3102.52,760 3155,812.48 3155,820 ; 3225,890 3230,895 3305,895 3310,900 3600,1190 3705,1190 3740,1225 3750,1225
  lines w82: 3155,820 3225,890
  lines w100: 810,1220 810,1160 1210,760 1527.72,760 ; 1400,1225 1400,1200 1720,880 1730,870 1735,870 1755,850 1780,825 1785,825 1790,820 1790,815 1800,805 1805,805 1820,790 1820,785 1840,765 1840,760 1842.68,760 ; 1650,1230 1650,1115 1910,855 1945,820 1960,805 1960,800 1975,785 1980,785 2000.16,764.84 2000.16,760 ; 1670,775.2 1685.2,760 ; 2315.12,760 2315.12,764.88 ; 2472.6,760 2472.6,762.6 2485,775 2510,800 2510,805 2530,825 2555,850 2555,1240 ; 2787.56,760 2787.56,762.56 2825,800 2840,815 2840,820 2860,840 ; 2850,830 3140,1120 3145,1120 3155,1130 3155,1220 ; 2945.04,760 2955,769.96 2955,775 3005,825 3295,1115 3320,1115 3360,1155 3400,1195 3405,1200 3405,1225 ; 3260,760 3590,760 3595,765 3750,920 3965,1135 3990,1160 3990,1190 3985,1195 3985,1205 4000,1220 ; 0,4685.04 0,4685.04
  lines w180: 4975,4570 4986.54,4570
  lines w200: 0,236.22 0,4685.04 236.22,4921.26 7244.09,4921.26 7480.32,4685.04 7480.32,236.22 7244.09,0 236.22,0 0,236.22
Bottom Solder:
  lines w100: 1365,1490 1440,1490 ; 1495,3600 1580,3600 ; 2050,1490 2130,1490 ; 2180,3600 2270,3600 ; 2735,1490 2810,1490 ; 2865,3600 2950,3600 ; 3425,1490 3505,1490 ; 3875,1530 3915,1490 4075,1490
  lines w150: 2828.15,4404.72 2828.15,4700 ; 2830,4215 2830,4405 ; 3020,4404.72 3020,4700 3590,4700 3645,4645 3735,4555 3860,4555 3925,4620 3990,4685 4250,4685
  lines w160: 305,3815 305,4020 ; 305,4245 305,4325 305,4335 ; 305,4330 415,4330 ; 315,1295 456.22,1153.78 456.22,972.48 ; 655,925 655,1365 780,1490 ; 2505,4570 2635,4440 2635,4335 ; 2620,4450 2640,4430 ; 2730,4115 2760,4145 2830,4215
  lines w180: 230,2520 230,2660 260,2690 265,2690 295,2720 ; 320,2295 360,2295 584.33,2519.33 584.33,2520 584.33,2670.67 540,2715 ; 456.22,689.02 650.98,689.02 ; 515,4110 520,4105 520,3740 ; 1475,4115 1485,4115 1650,4115 ; 1480,4330 1625,4330 ; 2505,4570 2503.46,4570 2510,4570 ; 3540,3600 3910,3600 3915,3595 ; 3910,1535 3910,1660 ; 4510,4685 4465,4685 4860,4685 4870,4675 4975,4570 4986.54,4570
  lines w200: 1818.46,4570 2220,4570 ; 0,236.22 236.22,0 7244.09,0 7480.32,236.22 7480.32,4685.04 7244.09,4921.26 236.22,4921.26 0,4685.04 0,236.22
Mechanical 1:
  lines w30: 0,4685.04 236.22,4921.26 7244.09,4921.26 7480.32,4685.04 7480.32,236.22 7244.09,0 236.22,0 0,236.22 0,4685.04 ; 0,4685.04 0,4685.04